# Altium PCB MB1814.PcbDoc (part 4 of 6)
Units mm, origin at the board's own origin, x right, y up, seen from the top; angles counter-clockwise.
Board outline 70 x 82.5 mm, 4 copper layers (Top Layer, Signal Layer 1, Signal Layer 2, Bottom Layer), stack 1.614 mm thick; 212 components, 160 nets, 914 pads, 715 vias.
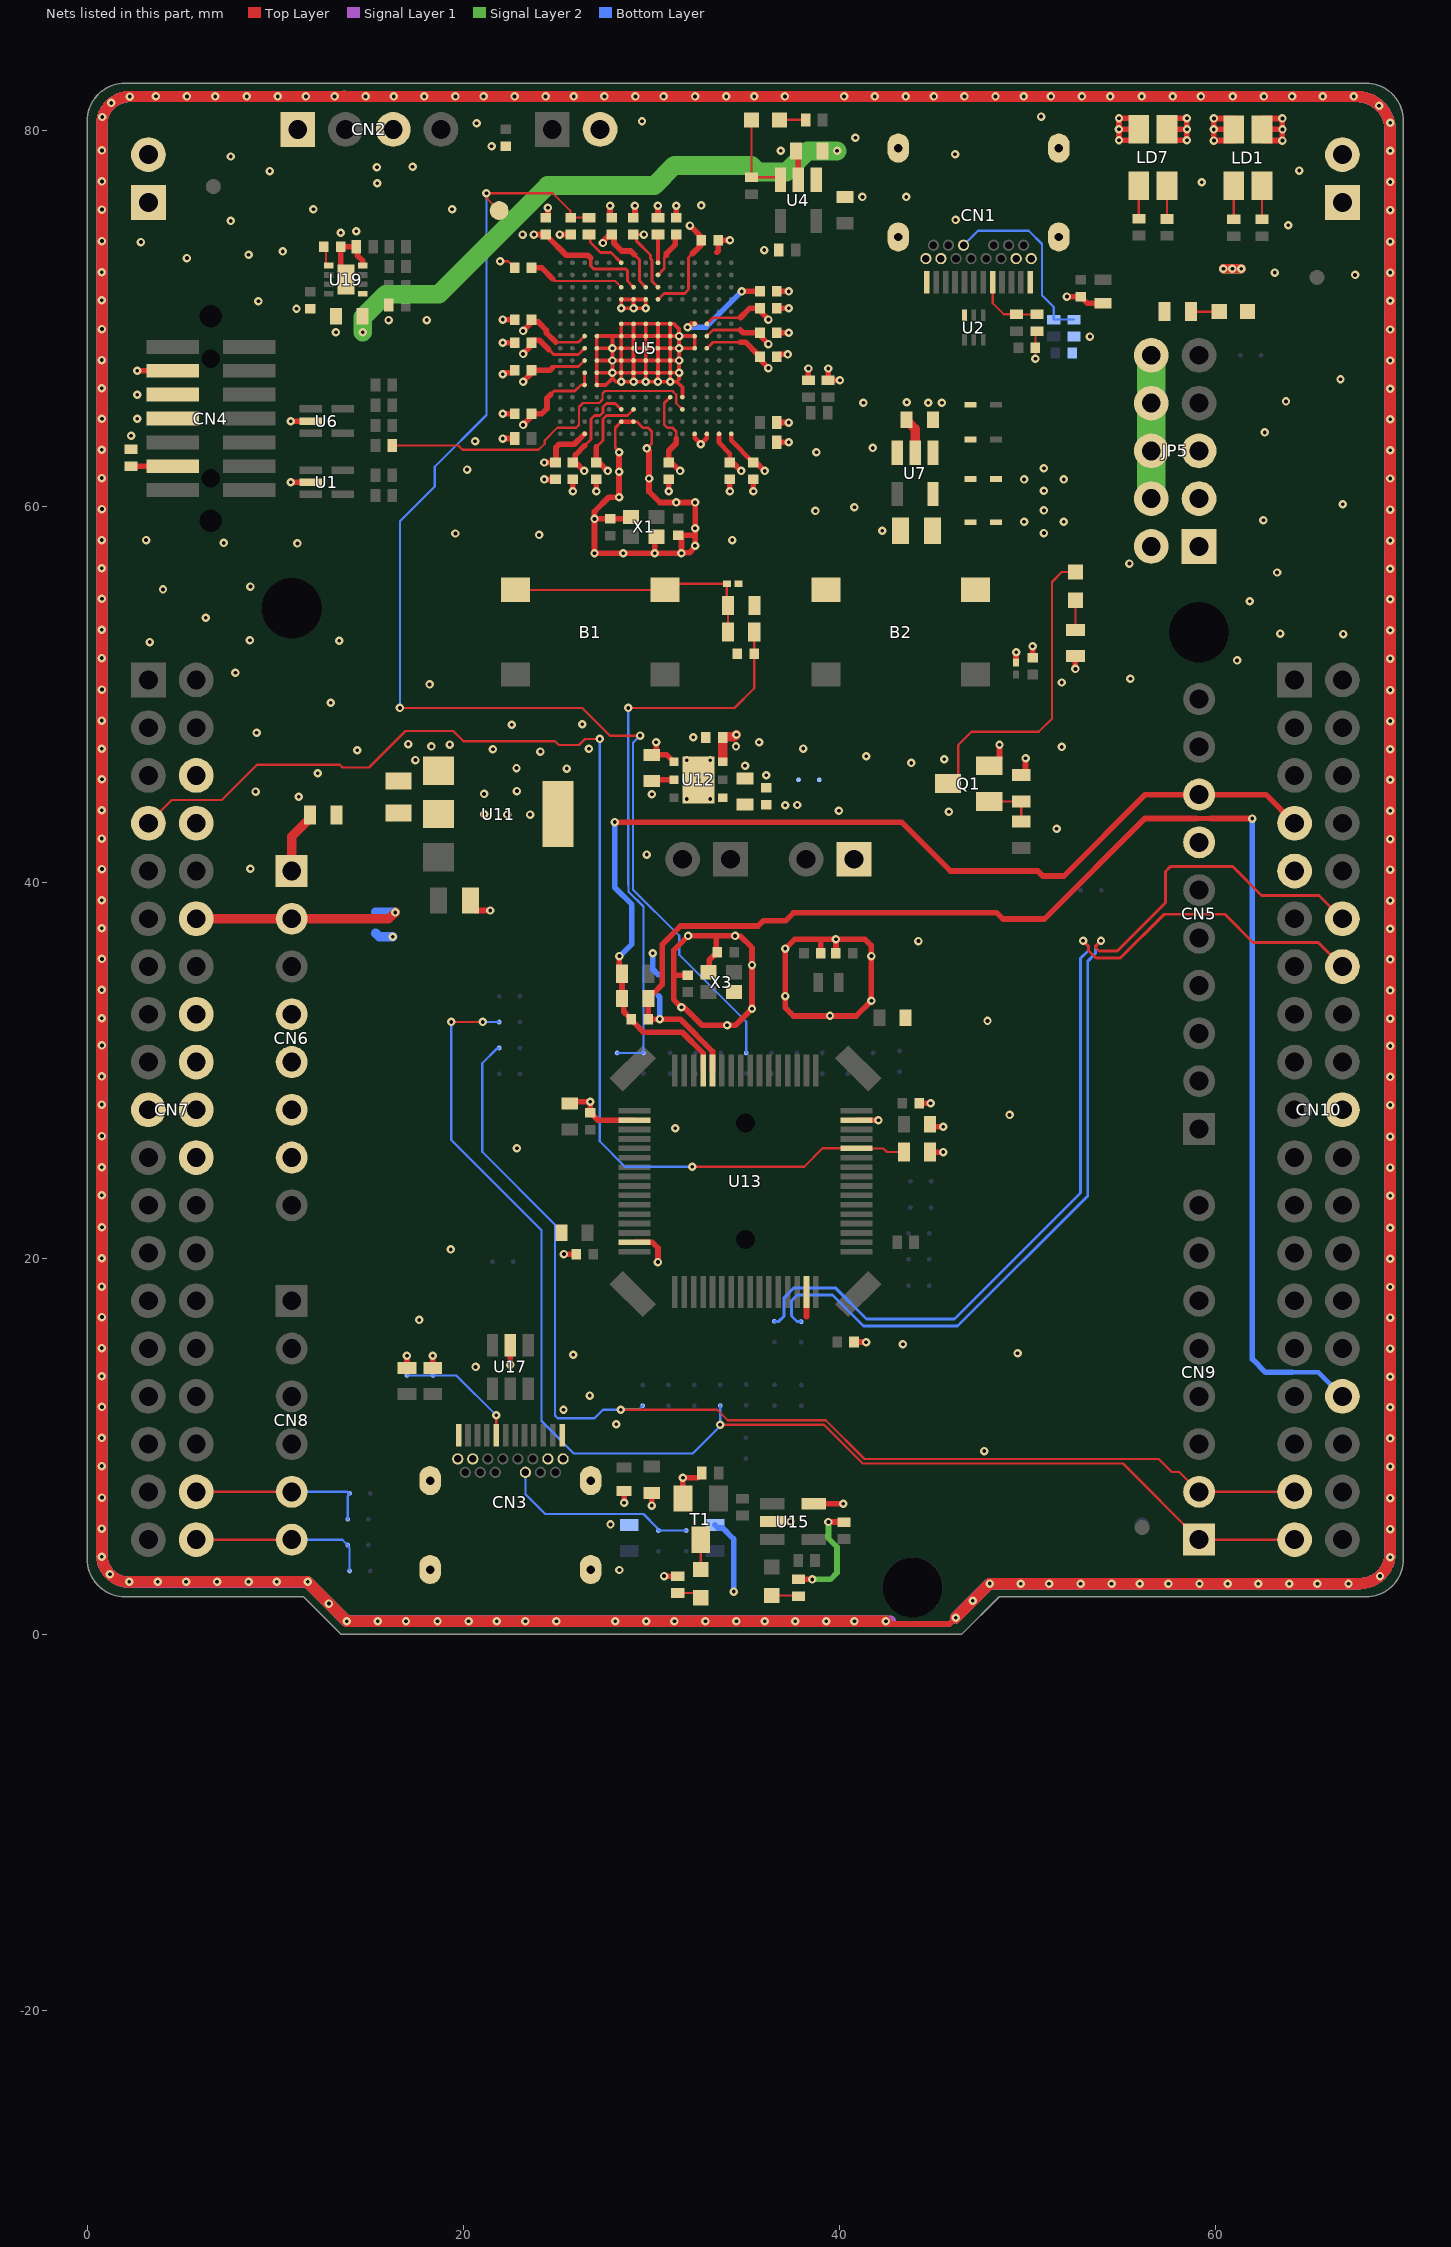
[diagram p4: the nets of this part, all layers, seen from the top]

## Via types
v1: diameter 0.45, hole 0.2, Top Layer to Bottom Layer, tented both sides, 715 vias

## Nets (pads, with @x,y where several pads share a name; then routed paths per layer and width w, separated by ;. In a path a pad name is that pad's centre, name@x,y a point inside that pad or via, vN(x,y) a via of type N, cw(c..) or ccw(c..) an arc to the next point about the centre after c; other vN are vias at no path point) (continued)
MCO: (continued)
  Bottom Layer w0.12: v1(16.625,49.275) 16.625,59.2 18.475,61.05 18.475,62.096 21.225,64.846 v1(21.225,76.65) ; v1(29.4,47.8) 29.025,47.425 29.025,39.6 31.475,37.15 31.475,36.15 35.04,32.585 SB27.1@35.04,30.925
NetB1_3: B1.3 B1.4 R26.2 R27.1 U9.1 | length 14
  Top Layer w0.12: B1.3@22.77,55.55 B1.4@30.72,55.55 31.045,55.875 U9.1@34.013,55.875 34.013,54.787 R26.2@34.075,54.725 34.07,54.72 R27.1@34.07,53.315
NetC4_2: C4.2 U5.J14 | length 2.5
  Top Layer w0.15: U5.J14@30.35,72.3 30.68,72.63 30.68,73.23 30.8,73.35
  Top Layer w0.3: 30.8,73.35 30.8,73.45 31.277,73.927 C4.2@31.277,74.45
NetC10_2: C10.2 U5.F13 | length 5.2
  Top Layer w0.12: 24.75,72.1 24.875,71.975 28.075,71.975 U5.F13@28.4,71.65
  Top Layer w0.3: C10.2@23.625,72.675 24.175,72.675 24.75,72.1
NetC12_2: C12.2 U5.M10 | length 5.1
  Top Layer w0.3: v1(31.925,69.525) 31.966,69.525 32.141,69.7 U5.M10@32.295,69.7 ; v1(34.8,71.425) C12.2@35.775,71.425
  Bottom Layer w0.3: v1(31.925,69.525) 32.909,69.525 v1@34.8,71.416
NetC19_2: C19.2 D1.2 D2.2 D3.2 D4.2 U7.3 U7.5
NetC30_2: C30.2 U19.1 | length 1.1
  Top Layer w0.12: C30.2@12.575,73.8 12.7,73.675 12.7,72.89 12.79,72.8 U19.1@12.85,72.8
NetC39_2: C39.2 C40.2 SB5.1 U12.4
  other v1: 37.125,44.1 37.755,44.11
NetCN1_A5: CN1.A5 R9.1 R13.1 | length 3.7
  Top Layer w0.12: CN1.A5@48.15,71.92 48.15,70.8 48.74,70.21 49.415,70.21 R13.1@49.425,70.2 R9.1@50.5,70.2
NetCN1_B5: CN1.B5 R14.1 R17.1 | length 10.1
  Bottom Layer w0.12: CN1.B5@46.6,73.88 47.37,74.65 50.075,74.65 50.775,73.95 50.775,71.225 51.4,70.6 R14.1@51.4,69.925 R17.1@52.475,69.925
NetCN3_A5: CN3.A5 SB1.2 SB4.2 | length 6.7
  Top Layer w0.12: CN3.A5@21.75,10.58 v1(21.75,11.65)
  Bottom Layer w0.12: SB1.2@17,13.775 SB4.2@18.375,13.775 19.625,13.775 v1(21.75,11.65)
NetCN3_B5: CN3.B5 SB7.2 SB8.2 | length 10.6
  Bottom Layer w0.12: CN3.B5@23.3,8.62 23.3,7.45 24.351,6.399 29.58,6.399 30.318,5.661 30.318,5.619 30.376,5.561 SB8.2@30.376,5.525 SB7.2@31.851,5.525
NetCN6_1: CN6.1 R30.1 | length 3.4
  Top Layer w0.5: CN6.1@10.87,40.6 10.87,42.438 11.757,43.325 11.78,43.325 11.85,43.395 R30.1@11.85,43.575
NetCN7_36: CN7.36 CN8.5 SB34.1 SB35.2 | length 9.6
  Top Layer w0.12: CN7.36@5.79,7.58 CN8.5@10.87,7.58
  Bottom Layer w0.12: CN8.5@10.87,7.58 13.834,7.58 13.914,7.5 SB34.1@13.95,7.5 13.95,7.464 13.85,7.364 SB35.2@13.85,6.125
NetCN7_38: CN7.38 CN8.6 SB36.2 SB37.1 | length 9.6
  Top Layer w0.12: CN7.38@5.79,5.04 CN8.6@10.87,5.04
  Bottom Layer w0.12: CN8.6@10.87,5.04 13.56,5.04 SB36.2@13.85,4.75 13.85,4.714 13.95,4.614 SB37.1@13.95,3.375
NetCN10_12: CN10.12 SB12.1 | length 52.4
  Top Layer w0.155: v1(53.911,36.886) 53.627,36.602 53.627,36.523 53.803,36.347 54.782,36.347 57.35,38.916 57.35,40.575 57.625,40.85 60.9,40.85 62.45,39.3 65.51,39.3 CN10.12@66.75,38.06
  Bottom Layer w0.155: SB12.1@37.967,16.636 37.745,16.636 37.445,16.936 37.445,17.745 37.75,18.05 39.625,18.05 41.281,16.394 46.283,16.394 53.206,23.317 53.206,35.8 53.627,36.221 53.627,36.602 v1(53.911,36.886)
NetCN10_14: CN10.14 SB44.1 | length 51.2
  Top Layer w0.155: v1(52.961,36.886) 53.246,36.602 53.246,36.365 53.645,35.966 54.939,35.966 57.273,38.3 60.5,38.3 62,36.8 65.47,36.8 CN10.14@66.75,35.52
  Bottom Layer w0.155: SB44.1@36.541,16.65 36.778,16.65 37.064,16.936 37.064,17.902 37.592,18.431 39.783,18.431 41.439,16.775 46.125,16.775 52.825,23.475 52.825,35.958 53.246,36.379 53.246,36.602 v1(52.961,36.886)
NetLD1_1: LD1.1 R3.1 | length 1.8
  Top Layer w0.12: R3.1@62.47,75.265 LD1.1@62.47,77.04
NetLD1_2: LD1.2 R2.2 | length 1.8
  Top Layer w0.12: R2.2@60.97,75.265 LD1.2@60.97,77.04
NetLD2_1: LD2.1 R25.2 | length 1.6
  Top Layer w0.12: R25.2@52.55,53.425 LD2.1@52.55,55
NetLD2_2: LD2.2 Q1.3 | length 16.6
  Top Layer w0.12: Q1.3@45.775,45.25 45.885,45.25 46.325,45.69 46.325,47.3 47.025,48 50.6,48 51.3,48.7 51.3,55.975 51.825,56.5 LD2.2@52.55,56.5
NetLD3_1: LD3.1 R7.1 | length 1.5
  Top Layer w0.12: R7.1@58.7,70.35 LD3.1@60.2,70.35
NetLD4_1: LD4.1 R1.1 | length 1.4
  Top Layer w0.12: LD4.1@36.825,80.55 R1.1@38.2,80.55
NetLD4_2: LD4.2 R6.1 U4.3 | length 4.6
  Top Layer w0.12: LD4.2@35.325,80.55 35.325,77.497 R6.1@35.327,77.495 36.742,77.495 U4.3@36.867,77.37
NetLD5_1: LD5.1 R36.1 | length 1.4
  Top Layer w0.12: LD5.1@36.4,2.075 37.775,2.075 R36.1@37.825,2.025
NetLD6_1: LD6.1 R38.1 | length 1.3
  Top Layer w0.12: R38.1@31.4,2.2 32.375,2.2 LD6.1@32.625,1.95
NetLD6_2: LD6.2 T1.3 | length 1.6
  Top Layer w0.12: LD6.2@32.625,3.45 T1.3@32.625,5.025
NetLD7_1: LD7.1 R23.1 | length 1.8
  Top Layer w0.12: R23.1@57.425,75.275 LD7.1@57.425,77.05
NetLD7_2: LD7.2 R24.1 | length 1.8
  Top Layer w0.12: R24.1@55.925,75.3 LD7.2@55.925,77.05
NetQ1_1: Q1.1 R28.2 R29.2 | length 2.8
  Top Layer w0.12: Q1.1@47.975,44.3 R28.2@49.675,44.3 R29.2@49.675,43.225
NetR4_1: R4.1 U5.F15 | length 2.5
  Top Layer w0.15: R4.1@26.675,74.45 26.744,74.381 26.744,74.058 27.302,73.5 27.85,73.5 U5.F15@28.4,72.95
NetR5_1: R5.1 U5.J15 | length 1.7
  Top Layer w0.2: R5.1@30.1,74.45 30.195,74.45 30.35,74.295 U5.J15@30.35,72.95